# Altium PCB captivate_phone.PcbDoc
Units mil, origin at the board's own origin, x right, y up, seen from the top; angles counter-clockwise.
Board outline 6900 x 5300 mil, 2 copper layers (Top Layer, Bottom Layer), stack 62 mil thick; 22 components, 22 nets, 83 pads, 102 vias.
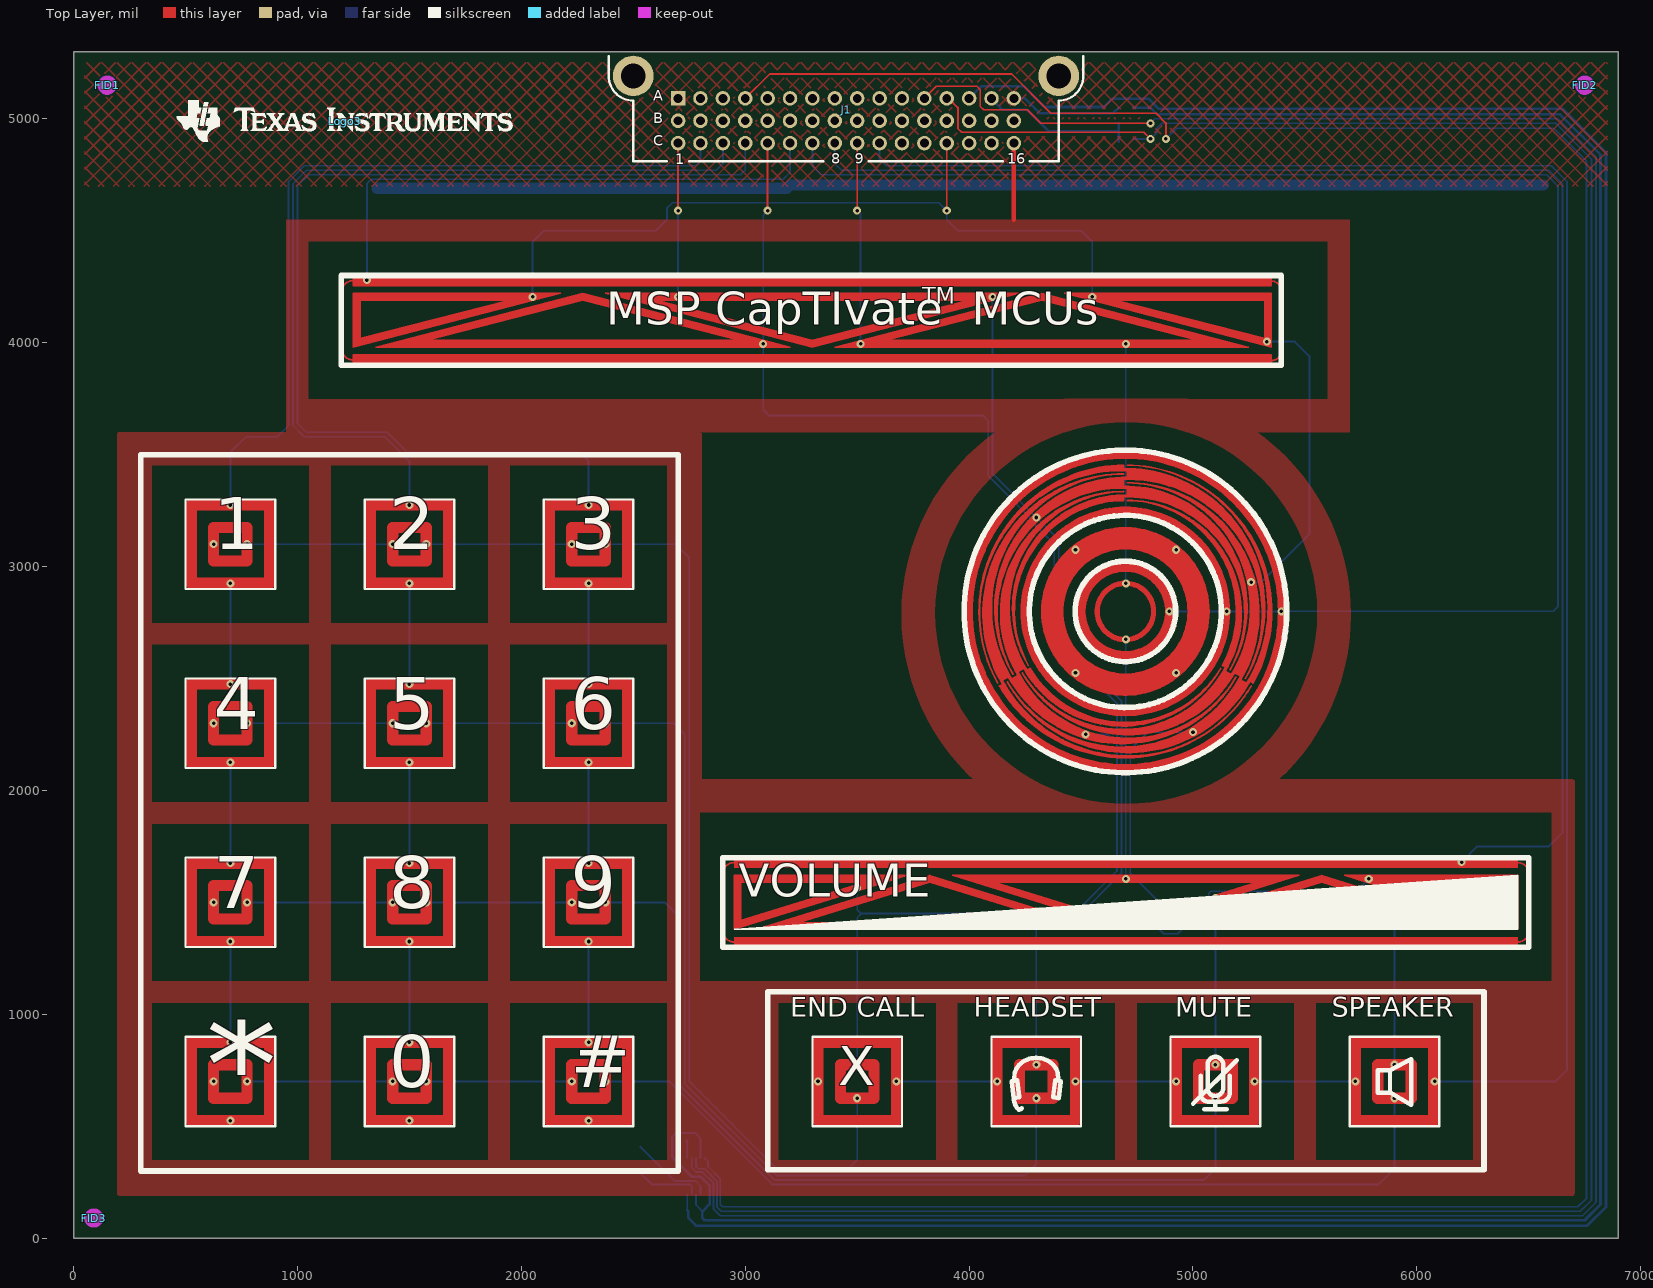
[diagram p0: Top Layer view]
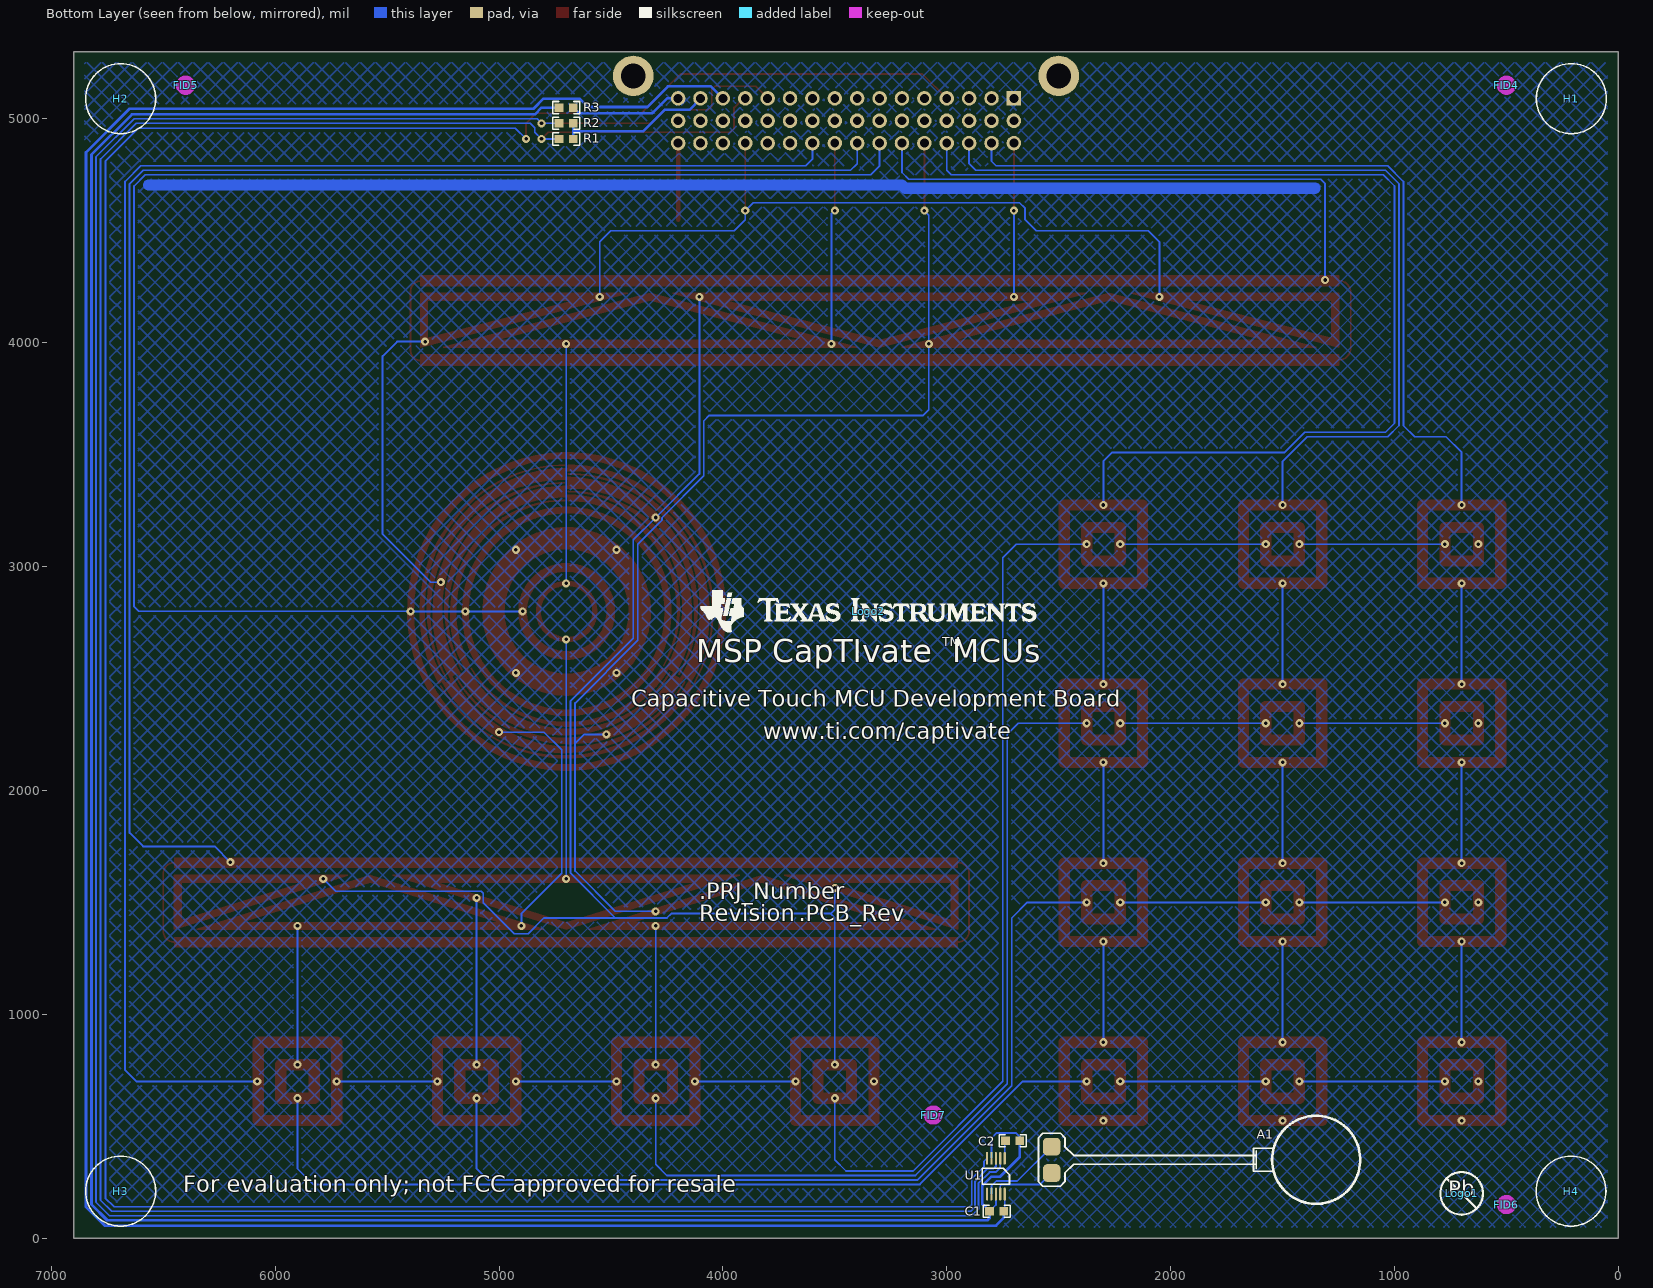
[diagram p1: Bottom Layer view, seen from below]

## Layer stack, top to bottom
Top Solder: solder mask 0.4, Solder Resist, Dk 3.5
Top Layer: signal copper 1.4
Dielectric1: core 59.2, FR-4, Dk 4.8
Bottom Layer: signal copper 1.4
Bottom Solder: solder mask 0.4, Solder Resist, Dk 3.5

## Board outline
0,0 0,5300 6900,5300 6900,0

## Design rules (kind name [scope] priority, off if disabled: settings)
AcuteAngle [All] p1: minimum=4.50000000000000E+0001 checktracksonly=TRUE
AssemblyTestPointUsage [All] p1: valid=2
Clearance Clearance_BoardEdge_MountingHoles [OnCopper and InComponentClass('Mounting Holes') vs IsKeepOut] p1: gap=40
Clearance Clearance_BoardEdge_Poly [OnCopper and InPoly vs IsKeepOut] p2: gap=8
Clearance Clearance_BoardEdge [OnCopper and Not InComponentClass('Logo') and not InComponentClass('FiducialMark') and not InRegion(1000,500,4000,800) and Not IsKeepout vs IsKeepOut] p3: gap=8
Clearance Clearance_Poly [InPolygon] p4: gap=12
Clearance [All] p5: gap=6
ComponentClearance ComponentClearance_Logo [InComponentClass(Logo)] p1: gap=50 collisioncheckmode=3 verticalgap=10 showdistances=FALSE
ComponentClearance ComponentClearance_ScrewToNut [(HasFootprint('NY PMS 440 0025 PH')) vs (HasFootprint('Keystone_1902C'))] p2: gap=5 collisioncheckmode=3 verticalgap=10 showdistances=FALSE
ComponentClearance ComponentClearance_MountingHoles [InComponentClass('Mounting Holes')] p3: gap=250 collisioncheckmode=3 verticalgap=100000 showdistances=FALSE
ComponentClearance ComponentClearance_SmallPassives [HasFootprint('0201*') or HasFootprint('0402*') or HasFootprint('0508') or HasFootprint('0603*') or HasFootprint('0612') or HasFootprint('0805*') or HasFootprint('0815*') or HasFootprint('0830*') or HasFootprint('1206*') or HasFootprint('1210*') or HasFootprint('1808*') or HasFootprint('1812*') or HasFootprint('1825*') or HasFootprint('2010*') or HasFootprint('2220*') or HasFootprint('2225*') or HasFootprint('2512*') or HasFootprint('2728*') or HasFootprint('3518*') vs HasFootprint('0201*') or HasFootprint('0402*') or HasFootprint('0508') or HasFootprint('0603*') or HasFootprint('0612') or HasFootprint('0805*') or HasFootprint('0815*') or HasFootprint('0830*') or HasFootprint('1206*') or HasFootprint('1210*') or HasFootprint('1808*') or HasFootprint('1812*') or HasFootprint('1825*') or HasFootprint('2010*') or HasFootprint('2220*') or HasFootprint('2225*') or HasFootprint('2512*') or HasFootprint('2728*') or HasFootprint('3518*')] p4: gap=20 collisioncheckmode=3 verticalgap=10 showdistances=FALSE
ComponentClearance ComponentClearance_THtoSMT [IsThruComponent vs IsSMTComponent] p5: gap=100 collisioncheckmode=3 verticalgap=100000 showdistances=FALSE
ComponentClearance ComponentClearance_THtoTH [IsThruComponent vs IsThruComponent] p6: gap=118.11 collisioncheckmode=3 verticalgap=100000 showdistances=FALSE
ComponentClearance [All] p7: gap=40 collisioncheckmode=3 verticalgap=10 showdistances=FALSE
DiffPairsRouting [All] p1: maxlimit=100 minlimit=10 mostfreqgap=10 toplayer_minwidth=15 toplayer_maxwidth=15 toplayer_prefwidth=15 bottomlayer_minwidth=15 bottomlayer_maxwidth=15 bottomlayer_prefwidth=15 maxuncoupledlength=1000
FabricationTestPointUsage TestPointUsage [All] p1: valid=2 allowmultiple=FALSE
FabricationTestpoint Testpoint [All] p1: side=3 testpointundercomponent=TRUE minsize=40 maxsize=100 preferedsize=60 minholesize=0 maxholesize=40 preferedholesize=32 testpointgrid=1 allowsidetop=TRUE allowsidebottom=TRUE usegrid=TRUE gridtolerance=0.01
FanoutControl Fanout_LCC [IsLCC] p1: bgadir=Out bgaviamode=Centered fanoutstyle=Auto fanoutdirection=Alternating viagrid=1 // Fanout_LCC (Default Rule)
FanoutControl Fanout_BGA [IsBGA] p2: bgadir=Out bgaviamode=Centered fanoutstyle=Auto fanoutdirection=Alternating viagrid=1 // Fanout_BGA (Default Rule)
FanoutControl Fanout_Default [All] p4: bgadir=Out bgaviamode=Centered fanoutstyle=Auto fanoutdirection=Alternating viagrid=1 // Fanout_Default (Default Rule)
FanoutControl Fanout_Small [(CompPinCount < 5)] p5: bgadir=Out bgaviamode=Centered fanoutstyle=Auto fanoutdirection=OutThenIn viagrid=1 // Fanout_Small (Default Rule)
HoleSize [All] p1: absolutevalues=TRUE maxlimit=251 minlimit=8 maxpercent=80.000 minpercent=20.000
MinimumAnnularRing [All] p1: minimumring=9
MinimumSolderMaskSliver MinimumSolderMaskSliver_Logo [InComponentClass('Logo') vs InComponentClass('Logo')] p1: minsoldermaskwidth=0.7
MinimumSolderMaskSliver [All] p2: minsoldermaskwidth=4
NetAntennae [All] p1 off: netantennaetolerance=0
PlaneConnect [All] p1: planeconnectstyle=Direct reliefexpansion=10 reliefentries=4 reliefconductorwidth=20 reliefairgap=10
PolygonConnect [All] p1: connectstyle=Direct reliefconductorwidth=12 reliefentries=4 polygonreliefangle="45 Angle" airgapwidth=10
RoutingVias [All] p1: holewidth=16 width=34 viastyle="Through Hole" minholewidth=8 minwidth=26 maxholewidth=40 maxwidth=65
SMDToCorner [All] p1: distance=30000
SilkToSilkClearance [All] p1: silktosilkclearance=5
SilkToSolderMaskClearance SilkscreenOverComponentPads [IsPad] p1: minsilkscreentomaskgap=5 clearancetoexposedcopper=TRUE
SolderMaskExpansion [All] p1: expansion=3
UnpouredPolygon [All] p1: allowunpoured=FALSE
Width [All] p1: maxlimit=100 minlimit=6 preferedwidth=10 checkconnectedcopper=TRUE
14 further rules are at their usual default settings.

## Classes and differential pairs
component class Logo: Logo2 Logo3
component class FiducialMark: FID1 FID2 FID3 FID4 FID5 FID6 FID7

## Components (designator, comment, footprint, x,y, rotation, side; value= is the part's Value field where it differs from the comment)
A1 "DMJBRN1030XX" SEMCO1030 1350,350 r0 bottom
C1 "C0603C105K8PACTU" 0603 2776.97,120 r0 bottom
C2 "C0603C105K8PACTU" 0603 2705.48,435 r180 bottom
FID1 "Fiducial" Fiducial10-20 150,5150 r0 top
FID2 "Fiducial" Fiducial10-20 6750,5150 r0 top
FID3 "Fiducial" Fiducial10-20 90,90 r0 top
FID4 "Fiducial" Fiducial10-20 500,5150 r180 bottom
FID5 "Fiducial" Fiducial10-20 6400,5150 r180 bottom
FID6 "Fiducial" Fiducial10-20 500,150 r180 bottom
FID7 "Fiducial" Fiducial10-20 3060,550 r180 bottom
H1 "SJ61A1" Bumpon_SJ61A1 210,5090 r90 bottom
H2 "SJ61A1" Bumpon_SJ61A1 6690,5090 r90 bottom
H3 "SJ61A1" Bumpon_SJ61A1 6690,210 r90 bottom
H4 "SJ61A1" Bumpon_SJ61A1 211.41,210 r90 bottom
J1 "CAPTIVATE-CONN-FR2633-PANEL" CAPTIVATE-CONN-48 3450,5300 r0 top
Logo1 "Pb-Free Symbol" Pb-Free_Overlay_Medium 700,200 r180 bottom
Logo2 "Texas Instruments" TI_Horizontal_Overlay_Medium 3350,2800 r180 bottom
Logo3 "Texas Instruments" TI_Horizontal_Overlay_Medium 1210,4990 r0 top
R1 "CRCW06035K23FKEA" 0603 4700,4910 r180 bottom
R2 "CRCW06035K23FKEA" 0603 4700,4980 r180 bottom
R3 "CRCW06030000Z0EA" 0603 4700,5050 r180 bottom
U1 "DRV2605LDGS" DGS0010A_L 2780.48,276.76 r270 bottom

## Footprints (in the part's own frame and the unit in brackets; to place one, negate y for a bottom-side part, rotate by r counter-clockwise, add the part's x,y. Pads: shape width x height; smd on the part's side, far side on the other; paste and mask are expansions set on the pad)
0603 [mm] "0603 from SM-752 data"
  rect 1x0.95 smd: 1(-0.8,0) 2(0.8,0)
  silkscreen extent -1.52,-0.69 1.52,0.69, body extent -0.87,-0.47 0.87,0.47, height 0.85
Bumpon_SJ61A1 [mil] "3M Cylindrical Bumpon black"
  round 1 on Mech4: 0(0,0)
  silkscreen extent -156,-156 156,156, body extent -156,-155 156,156, height 201
CAPTIVATE-CONN-48 [mm] "Connector, 3x16, 100mil, TH, RA"
  rect 1.65x1.65 hole 1: A1(-19.05,-5.3)
  round 1.65 hole 1: A2(-16.51,-5.3) A3(-13.97,-5.3) A4(-11.43,-5.3) A5(-8.89,-5.3) A6(-6.35,-5.3) A7(-3.81,-5.3) A8(-1.27,-5.3) A9(1.27,-5.3) A10(3.81,-5.3) A11(6.35,-5.3) A12(8.89,-5.3) A13(11.43,-5.3) A14(13.97,-5.3) A15(16.51,-5.3) A16(19.05,-5.3) B1(-19.05,-7.84) B2(-16.51,-7.84) B3(-13.97,-7.84) B4(-11.43,-7.84) B5(-8.89,-7.84) B6(-6.35,-7.84) B7(-3.81,-7.84) B8(-1.27,-7.84) B9(1.27,-7.84) B10(3.81,-7.84) B11(6.35,-7.84) B12(8.89,-7.84) B13(11.43,-7.84) B14(13.97,-7.84) B15(16.51,-7.84) B16(19.05,-7.84) C1(-19.05,-10.38) C2(-16.51,-10.38) C3(-13.97,-10.38) C4(-11.43,-10.38) C5(-8.89,-10.38) C6(-6.35,-10.38) C7(-3.81,-10.38) C8(-1.27,-10.38) C9(1.27,-10.38) C10(3.81,-10.38) C11(6.35,-10.38) C12(8.89,-10.38) C13(11.43,-10.38) C14(13.97,-10.38) C15(16.51,-10.38) C16(19.05,-10.38)
  round 4.6 hole 2.8: H1(-24.13,-2.76) H2(24.13,-2.76)
  silkscreen extent -26.92,-12.45 26.92,-0.51
DGS0010A_L [mm] "TSSOP, 10-Leads, Body 3x3mm, Pitch 0.5mm, IPC High Density"
  oval 1.45x0.25 smd: 1(-2.025,1) 2(-2.025,0.5) 3(-2.025,0) 4(-2.025,-0.5) 5(-2.025,-1) 6(2.025,-1) 7(2.025,-0.5) 8(2.025,0) 9(2.025,0.5) 10(2.025,1)
  silkscreen extent -0.9,-1.55 0.9,1.55, body extent -2.45,-1.5 2.45,1.5, height 0.94
Fiducial10-20 [mm]
  round 1 smd mask+0.5: 1(0,0)
  Top Layer keep-out circle w1.178: c0,0 r0.5
Pb-Free_Overlay_Medium [mil]
  silkscreen extent -95,-95 95,95
SEMCO1030 [mm] "Footprint for SEMCO 10mm x 3mm LRA"
  rrect50% 2x2 smd: 1(30,1.5) 2(30,-1.5)
  silkscreen extent -5,-5 31.5,5
TI_Horizontal_Overlay_Medium [mil]
  silkscreen extent -750,-93 750,94

## Part data
A1: "Linear Resonant Actuator"
C1 C2: "CAP, CERM, 1 µF, 10 V, +/- 10%, X5R, 0603"
FID1 FID2 FID3 FID4 FID5 FID6 FID7: "Fiducial mark.  There is nothing to buy or mount."
H1 H2 H3 H4: "Bumpon, Cylindrical, 0.312 X 0.200, Black"
J1: library part CAPTIVATE-CONN-MSP-EXP430FR2633-PANEL, "CapTIvate Panel-Side Connector, 3x16, 100mil, TH, RA, M, MSP-EXP430FR2633"
Logo1: library part Pb-Free
Logo2 Logo3: library part TI_Logo, "Texas Instrument Corporate Signature"
R1 R2: "RES, 5.23 k, 1%, 0.1 W, 0603"
R3: "RES, 0, 5%, 0.1 W, 0603"
U1: "Haptic Driver for LRA and ERM With Built-In Library and Smart Loop Architecture, DGS0010A"

## Via types
v1: diameter 36, hole 16, Top Layer to Bottom Layer, tented both sides, 102 vias

## Nets (pads, with @x,y where several pads share a name; then routed paths per layer and width w, separated by ;. In a path a pad name is that pad's centre, name@x,y a point inside that pad or via, vN(x,y) a via of type N, cw(c..) or ccw(c..) an arc to the next point about the centre after c; other vN are vias at no path point)
CAP0.0: J1.C1 | length 39694.2
  Top Layer w6: 2375,4220 3300,3980 4108.92,4189.88 4225,4220 2375,4220 ; 2605,4190 3995,4190 3300,4010 2605,4190 ; 2950,1380 2950,1620 3725,1620 3504.15,1551.61 2950,1380 ; 2980,1420 2980,1590 3535,1590 3496,1578.05 2980,1420 ; 5675,1620 5779.61,1587.6 6450,1380 6450,1620 5675,1620 ; 5865,1590 6420,1420 6420,1590 5865,1590
  Top Layer w7.87: 4128.03,2479.58 cw(c4684.26,2791.63) 4705.78,3429.04 4705.78,3397.88 ccw(c4697.91,2815.27) 4196.22,2518.95 cw(c4684.25,2791.63) 4705.78,3350.25 4705.78,3319.13 ccw(c4697.91,2815.28) 4264.42,2558.33 cw(c4697.91,2799.51) 4690.03,3295.51 4690.03,3310.85 cw(c4711.57,2791.62) 5165.5,2538.64 ccw(c4697.91,2815.28) 4690.03,3358.51 4690.03,3389.65 cw(c4711.56,2791.63) 5233.69,2499.27 ccw(c4697.91,2815.27) 4690.03,3437.26 4690.03,3453.01 ccw(c4697.91,2799.51) 4128.03,2479.58
  Top Layer w8: v1(2700,4590) J1.C1
  Top Layer w50: 625,3025 775,3025 775,3175 625,3175 v1(625,3100) 625,3025 ; 1425,3025 1575,3025 1575,3175 1425,3175 1425,3025 ; 2225,3025 2375,3025 v1(2375,3100) 2375,3175 2225,3175 2225,3025 ; 3425,625 3425,775 v1(3500,775) 3575,775 3575,625 3425,625
  Bottom Layer w8: v1(775,3100) v1(1425,3100) ; v1(1575,3100) v1(2225,3100) ; v1(2375,3100) 2690,3100 2750,3040 2750,700 3150,300 3450,300 3500,350 v1(3500,625) ; v1(2700,4205) v1(2700,4590) ; v1(3500,775) 3500,1432.5 3517.5,1450 ; v1(3500,1565) 3500,1467.5 3517.5,1450 ; v1(4105,4205) 4105,3414 v1(4300,3219) 4400,3119 4400,2680 4680,2400 4680,1630 4480,1430 ; v1(5785,1605) 5730,1550 5080,1550 5070,1540 5070,1498.13 4931.87,1360 4870,1360 4800,1430 4480,1430 ; 3517.5,1450 4230,1450 4250,1430 4480,1430
CAP0.1: J1.C2 | length 10543.3
  Top Layer w50: 525,525 525,875 875,875 875,525 525,525 ; 525,1325 525,1675 875,1675 875,1325 525,1325 ; 525,2125 525,2475 875,2475 875,2125 525,2125 ; 525,2925 525,3275 v1(700,3275) 875,3275 875,2925 525,2925
  Bottom Layer w8: v1(700,875) v1(700,1325) ; v1(700,1675) v1(700,2125) ; v1(700,2475) v1(700,2925) ; v1(700,3275) 700,3510 770,3580 910,3580 960,3630 960,4720 1030,4790 2780,4790 2800,4810 J1.C2
  other v1: 700,525
CAP0.2: J1.C3 | length 10859.9
  Top Layer w50: 1325,525 1325,875 1675,875 1675,525 1325,525 ; 1325,1325 1325,1675 1675,1675 1675,1325 1325,1325 ; 1325,2125 1675,2125 1675,2475 1325,2475 1325,2125 ; 1325,2925 1675,2925 1675,3275 v1(1500,3275) 1325,3275 1325,2925
  Bottom Layer w8: v1(1500,875) v1(1500,1325) ; v1(1500,1675) v1(1500,2125) ; v1(1500,2475) v1(1500,2925) ; v1(1500,3275) 1500,3470 1390,3580 1030,3580 980,3630 980,4710 1040,4770 2870,4770 2900,4800 J1.C3
  other v1: 1500,525
CAP0.3: J1.C4 | length 11725.7
  Top Layer w50: 2125,525 2125,875 2475,875 2475,525 2125,525 ; 2125,1325 2475,1325 2475,1675 2125,1675 2125,1325 ; 2125,2125 2475,2125 2475,2475 2125,2475 2125,2125 ; 2125,2925 2125,3275 v1(2300,3275) 2475,3275 2475,2925 2125,2925
  Bottom Layer w8: v1(2300,875) v1(2300,1325) ; v1(2300,1675) v1(2300,2125) ; v1(2300,2475) v1(2300,2925) ; v1(2300,3275) 2300,3470 2260,3510 1490,3510 1400,3600 1040,3600 1000,3640 1000,4700 1050,4750 2980,4750 3000,4770 J1.C4
  other v1: 2300,525
CAP1.0: J1.C5 | length 37723.2
  Top Layer w6: 1350,3980 2275,4220 3083.92,4010.12 3200,3980 1350,3980 ; 1580,4010 2970,4010 2275,4190 1580,4010 ; 3050,1380 4600,1380 4504.51,1409.57 4303.65,1471.77 3829.24,1618.69 3825,1620 3820.76,1618.69 3050,1380 ; 3240,1410 3825,1590 4295.46,1445.24 4410,1410 3240,1410
  Top Layer w7.87: 4135.9,2465.94 ccw(c4697.91,2799.51) 5259.87,2465.86 cw(c4711.56,2791.63) 4148.78,2491.56 4175.77,2507.14 ccw(c4684.26,2791.63) 5191.72,2505.32 cw(c4711.56,2791.63) 4217.02,2530.96 4243.96,2546.52 ccw(c4684.25,2791.62) 5123.52,2544.69 cw(c4697.91,2799.51) 4272.3,2544.69 4259.02,2537.02 cw(c4697.91,2815.28) 4690.03,3334.88 ccw(c4684.25,2791.63) 4217.74,2513.19 4190.77,2497.62 cw(c4697.91,2815.27) 4690.03,3413.63 ccw(c4684.26,2791.63) 4149.54,2473.82 4135.9,2465.94
  Top Layer w8: v1(3100,4590) J1.C5 J1.C5@3100,4910
  Top Layer w50: 625,2225 v1(625,2300) 625,2375 775,2375 775,2225 625,2225 ; 1425,2225 1425,2375 1575,2375 1575,2225 1425,2225 ; 2225,2225 2225,2375 2375,2375 v1(2375,2300) 2375,2225 2225,2225 ; 4225,625 4225,775 v1(4300,775) 4375,775 4375,625 v1(4300,625) 4225,625
  Bottom Layer w8: v1(775,2300) v1(1425,2300) ; v1(1575,2300) v1(2225,2300) ; v1(2375,2300) 2680,2300 2730,2250 2730,690 3140,280 4250,280 4300,330 v1(4300,625) ; v1(3100,4590) 3080,4570 v1(3080,3995) 3080,3700 3105,3675 4060,3675 4085,3650 4085,3405 4272,3218 4272,3207.4 4288.4,3191 4289,3191 4380,3100 4380,2670 4660,2390 4660,2210 ; v1(4300,775) v1(4300,1395) ; v1(4300,1460) 4480,1460 4660,1640 4660,2210 ; v1(4520,2250) 4620,2250 4660,2210
CAP1.1: J1.C6 | length 19876.2
  Top Layer w6: 1250,3900 5350,3900 5350,3945 1250,3945 1250,3922.5 1250,3900 ; 1250,4255 1250,4277.5 1250,4300 5350,4300 5350,4255 1250,4255
  Top Layer w8: 1250,3922.5 cw(c1250,3977.5) 1195,3977.5 1195,4222.5 cw(c1250,4222.5) 1250,4277.5 ; 5350,3920 ccw(c5350,3965) 5395,3965 5395,4230 ccw(c5350,4230) 5350,4275
  Bottom Layer w8: v1(1310,4280) 1310,4710 1330,4730 3170,4730 3200,4760 J1.C6
CAP1.2: J1.C7 | length 22822.1
  Top Layer w7.87: 4697.91,2090.85 ccw(c4697.91,2799.51) 5203.5,3296.08 ccw(c4697.91,2799.51) 4697.91,3508.17 ; 4697.91,2090.85 cw(c4697.91,2799.51) 4697.91,3508.17 ; 4697.91,2090.85 4697.91,2114.47 ; 4697.91,2114.47 ccw(c4697.91,2799.51) 4697.91,3484.55 ; 4697.91,2114.47 cw(c4697.91,2799.51) 4697.91,3484.55 ; 4697.91,3484.55 4697.91,3508.17 ; v1@5138.85,2799.51 ccw(c4697.91,2799.51) v1@5138.85,2799.51 ; v1@5162.48,2799.51 ccw(c4697.91,2799.51) v1@5162.48,2799.51
  Top Layer w39.37: v1(4894.76,2799.51) ccw(c4697.91,2799.51) v1(4894.76,2799.51)
  Bottom Layer w8: J1.C7 3300,4790 3340,4750 6580,4750 6630,4700 6630,2820 6610,2800 v1(5395,2800) ; v1(4894.76,2799.51) v1@5394.51,2799.51
  other v1: 5150,2800
CAP1.3: J1.C8 | length 7606.6
  Top Layer w8: 2950,1322.5 cw(c2950,1372.5) 2900,1372.5 2900,1627.5 cw(c2950,1627.5) 2950,1677.5 ; 6450,1322.5 ccw(c6450,1372.5) 6500,1372.5 6500,1627.5 ccw(c6450,1627.5) 6450,1677.5
  Bottom Layer w8: J1.C8 3400,4800 3430,4770 6590,4770 6650,4710 6650,1810 6590,1750 6270,1750 v1(6200,1680)
CAP2.0: J1.C9 | length 24465.3
  Top Layer w6: 3400,3980 5250,3980 4325,4220 3511.39,4008.9 3400,3980 ; 3630,4010 5020,4010 4325,4190 3630,4010 ; 3925,1620 5475,1620 5104.56,1505.28 4700,1380 3925,1620 ; 4115,1590 5285,1590 5096.32,1531.95 4700,1410 4115,1590
  Top Layer w8: v1(3500,4590) J1.C9 J1.C9@3500,4910
  Top Layer w23.62: 4823.9,2799.45 ccw(c4697.91,2799.45) 4823.9,2799.45
  Top Layer w50: 625,1425 v1(625,1500) 625,1575 775,1575 775,1425 625,1425 ; 1425,1425 v1(1425,1500) 1425,1575 1575,1575 1575,1425 1425,1425 ; 2225,1425 v1(2225,1500) 2225,1575 2375,1575 v1(2375,1500) 2375,1425 2225,1425 ; 5025,625 5025,775 v1(5100,775) 5175,775 5175,625 5025,625
  Bottom Layer w8: v1(775,1500) v1(1425,1500) ; v1(1575,1500) v1(2225,1500) ; v1(2375,1500) 2640,1500 2710,1430 2710,680 3130,260 5050,260 5100,310 v1(5100,625) ; v1(3500,4590) 3515,4575 v1(3515,3995) ; v1(4700,1605) v1(4700,2675) ; v1(4700,2925) v1(4700,3995) ; v1(5100,775) v1(5100,1520)
CAP2.1: J1.C10 | length 14713.5
  Top Layer w50: 3325,525 3675,525 3675,875 3325,875 3325,525 ; 4125,525 v1(4125,700) 4125,875 4475,875 4475,525 4125,525 ; 4925,525 v1(4925,700) 4925,875 5275,875 5275,525 4925,525 ; 5725,525 v1(5725,700) 5725,875 6075,875 6075,525 5725,525
  Bottom Layer w8: J1.C10 3600,4820 3630,4790 6600,4790 6670,4720 6670,750 6620,700 v1(6080,700) ; v1(3675,700) v1(4125,700) ; v1(4475,700) v1(4925,700) ; v1(5275,700) v1(5725,700)
  other v1: 3325,700
CAP3.0: J1.C13 | length 39428
  Top Layer w6: 1945,4190 1280,4020 1280,4190 1945,4190.14 ; 1250,3980 1250,4220 2175,4220 2054.24,4188.67 1250,3980 ; 4425,4220 5350,4220 5350,3980 5325.18,3986.44 4545.76,4188.67 4425,4220 ; 4655,4190 5320,4190 5320,4020 4655,4190 ; 4800,1380 4895.49,1409.57 5570.76,1618.69 5575,1620 5579.24,1618.69 6350,1380 4800,1380 ; 4990,1410 5575,1590 6160,1410 4990,1410
  Top Layer w7.87: 4170,2485.63 ccw(c4684.26,2791.63) 5212.92,2511.26 5185.95,2526.83 cw(c4711.56,2791.63) 4238.2,2525 ccw(c4684.25,2791.62) 5144.68,2550.66 5131.4,2558.33 ccw(c4697.91,2799.51) 4705.79,3295.51 cw(c4711.57,2791.62) 5143.98,2532.88 5170.93,2517.32 ccw(c4697.91,2815.28) 4705.78,3374.26 cw(c4711.56,2791.63) 5212.18,2493.5 5239.16,2477.92 ccw(c4697.91,2815.27) 4705.87,3453 cw(c4697.91,2799.51) 5267.79,2479.58 5254.15,2487.45 cw(c4711.56,2791.63) 4170,2485.63
  Top Layer w8: v1(3900,4590) J1.C13
  Top Layer w50: 625,625 v1(625,700) 625,775 775,775 775,625 625,625 ; 1425,625 1575,625 1575,775 1425,775 v1(1425,700) 1425,625 ; 2225,625 v1(2225,700) 2225,775 2375,775 v1(2375,700) 2375,625 2225,625 ; 5825,625 5825,775 v1(5900,775) 5975,775 5975,625 5825,625
  Bottom Layer w8: v1(775,700) v1(1425,700) ; v1(1575,700) v1(2225,700) ; v1(2050,4205) 2050,4450 2100,4500 2600,4500 2650,4550 2650,4600 2675,4625 3865,4625 v1(3900,4590) 3900,4550 3950,4500 4500,4500 4550,4450 v1(4550,4205) ; v1(2375,700) 2660,700 3120,240 5830,240 5900,310 v1(5900,625) ; v1(4900,1395) 4900,1450 4720,1630 4720,2180.94 4799.06,2260 v1(5000,2260) ; v1(5260,2930) 5305,2930 5520,3145 5520,3940 5455,4005 v1(5330,4005) ; v1(5900,775) v1(5900,1395)
CAP3.3: J1.C16 | length 341.3
  Top Layer w20: 4200,4550 J1.C16
DRV_GND: C1.2 C2.2 R3.1 U1.4 U1.8 | length 11698.4
  Bottom Layer w8: C2.2@2673.98,452.98 2691,470 2776,470 2800.16,445.84 U1.4@2800.16,357.47 ; U1.8@2780.48,196.06 2780.48,147.99 C1.2
  Bottom Layer w12: C2.2@2673.98,452.98 C2.2 2673.98,362.02 2761,275 2801,275 2841,235 2841,152.53 C1.2 2808.47,90.07 2818.54,80 6750,80 6820,150 6820,4840 6640,5020 4840,5020 4810,5050 R3.1
DRV_OUT+: A1.2 U1.7 | length 378.9
  Bottom Layer w8: A1.2 2685,255.16 2778.01,255.16 2800.16,233.01 U1.7@2800.16,196.06
DRV_OUT-: A1.1 U1.9 | length 290.6
  Bottom Layer w8: A1.1 2582.05,240 2753.8,240 2760.79,233.01 U1.9@2760.79,196.06
DRV_VREG: C2.1 U1.1 | length 78.4
  Bottom Layer w8: U1.1@2741.11,357.47 C2.1@2741.11,432.87
  Bottom Layer w12: C2.1@2738.98,435 C2.1@2741.11,432.87
GND: J1.A1 J1.A16 R3.2 | length 7797.3
  Top Layer w12: J1.A1 J1.A1@2721.34,5091.34
  Top Layer w100: 5024.83,2799.45 ccw(c4698.06,2799.45) 5024.83,2799.45
  Bottom Layer w12: J1.A16 4248.66,5091.34 4315,5025 4643.5,5025 R3.2
  Bottom Layer w50: 1355,4690 3185,4690 3200,4705 6565.24,4705
  other v1: 4475,2525 4925,2525 4475,3075 4925,3075
P1.0: J1.A4 U1.5 | length 12801.7
  Top Layer w8: J1.A4 3110,5200 4190,5200 4365,5025 4835,5025 4879.16,4980.84 v1(4879.16,4910)
  Bottom Layer w8: U1.5@2819.85,357.47 2833.54,343.78 2833.54,320 2888.54,265 2888.54,150 2898.54,140 3040,140 6720.89,142 6758,179.11 6758,4810.89 6610.89,4958 4927.16,4958 v1(4879.16,4910)
SCL: J1.A12 R2.1 U1.2 | length 12236.2
  Top Layer w8: J1.A12@3800,5080 J1.A12 3853.66,5145 4035,5145 4050,5130 4050,5055 4065,5040 4260,5040 4320,4980 v1(4810,4980)
  Bottom Layer w8: U1.2@2760.79,357.47 2760.79,314.69 2780.48,295 2808.54,295 2858.54,245 2858.54,130 2888.54,100 6740,100 6800,160 6800,4830 6630,5000 4830,5000 v1(4810,4980) R2.1
SDA: J1.A13 R1.1 U1.3 | length 12052.9
  Top Layer w8: J1.A13 3908.66,5091.34 3950,5050 3950,4956.69 3966.69,4940 4780,4940 v1(4810,4910)
  Bottom Layer w8: U1.3@2780.48,357.47 2780.48,320.52 2791,310 2818.54,310 2873.54,255 2873.54,140 2893.54,120 6730,120 6780,170 6780,4820 6620,4980 4860,4980 4840,4960 4840,4940 v1(4810,4910) R1.1
VCC_3P3V: J1.A15 R1.2 R2.2 | length 711.4
  Bottom Layer w12: J1.A15@4100,5090 4150,5040 4260,5040 4355,4945 4668.5,4945 ; R1.2@4668.5,4898.5 R1.2 4668.5,4945 ; R2.2 4668.5,4945
  Bottom Layer w20: J1.A15@4100,5090 J1.A15
VCC_5V: C1.1 J1.A14 U1.10 | length 11986
  Bottom Layer w8: C1.1@2741.11,124.37 U1.10@2741.11,196.06
  Bottom Layer w12: C1.1@2741.11,124.37 C1.1 2745.48,90.52 2780,56 6761,56 6845,140 6845,4850 6650,5045 4846.11,5045 4801.11,5090 4640,5090 4603,5053 4337,5053 4245,5145 4053.66,5145 J1.A14
pads on no net: FID1.1 FID2.1 FID3.1 FID4.1 FID5.1 FID6.1 FID7.1 H1.0 H2.0 H3.0 H4.0 J1.A2 J1.A3 J1.A5 J1.A6 J1.A7 J1.A8 J1.A9 J1.A10 J1.A11 J1.B1 J1.B2 J1.B3 J1.B4 J1.B5 J1.B6 J1.B7 J1.B8 J1.B9 J1.B10 J1.B11 J1.B12 J1.B13 J1.B14 J1.B15 J1.B16 J1.C11 J1.C12 J1.C14 J1.C15 J1.H1 J1.H2 U1.6

## Polygon pours and split planes (outlines as drawn)
GND on Top Layer "Top Layer-No Net 3" (hatched 45Degree grid 48 track 8, remove dead copper, pour order 10): 50,5250 50,4700 6850,4700 6850,5250 50,5250
CAP3.3 on Top Layer "Top Layer-No Net 1" (solid, pour order 12): 950,3600 5700,3600 5700,4550 950,4550
CAP3.3 on Top Layer "Top Layer-No Net" (solid, pour order 11): 194.99,195 194.99,3595 cw(c200,3595) 200,3600.02 2800,3600.02 cw(c2800,3595) 2805.01,3595 2805.01,2050.01 4019.02,2050.01 cw(c4701.5,2785) 5704.49,2785 cw(c4701.5,2785) 5383.98,2050.01 6700,2050.01 cw(c6700,2045) 6705.02,2045 6705.02,195 cw(c6700,195) 6700,189.98 200,189.98 cw(c200,195)
GND on Bottom Layer "Bottom Layer-No Net" (hatched 45Degree grid 48 track 8, remove dead copper, pour order 8): 50,50 6850,50 6850,5250 50,5250

## Other copper
Top Layer:
  region net CAP1.3: 2950,1300 2950,1345 6450,1345 6450,1300
  region net CAP1.3: 2950,1700 2950,1655 6450,1655 6450,1700
  region net CAP0.0: 5675,1620 6450,1620 6450,1380 5675,1620 5865,1590 6420,1590 6420,1420 5865,1590
  region net CAP3.0: 4800,1380 6350,1380 5575,1620 4800,1380 4990,1410 6160,1410 5575,1590 4990,1410
  region net CAP2.0: 3925,1620 4700,1380 5475,1620 3925,1620 4115,1590 4700,1410 5285,1590 4115,1590
  region net CAP1.0: 3050,1380 3825,1620 4595,1380 3050,1380 3240,1410 3825,1590 4410,1410 3240,1410
  region net CAP0.0: 2950,1620 3725,1620 2950,1380 2950,1620 2980,1590 3535,1590 2980,1420 2980,1590
  pour cut-out: 1050,3750 1050,4450 5600,4450 5600,3750
  pour cut-out: 2800,1150 6600,1150 6600,1900 2800,1900
  pour cut-out: 5550,350 5550,1050 6250,1050 6250,350
  pour cut-out: 4750,350 4750,1050 5450,1050 5450,350
  pour cut-out: 3950,350 3950,1050 4650,1050 4650,350
  pour cut-out: 3150,350 3150,1050 3850,1050 3850,350
  pour cut-out: 1950,350 1950,1050 2650,1050 2650,350
  pour cut-out: 1150,350 1150,1050 1850,1050 1850,350
  pour cut-out: 350,350 350,1050 1050,1050 1050,350
  pour cut-out: 1950,1150 1950,1850 2650,1850 2650,1150
  pour cut-out: 1150,1150 1150,1850 1850,1850 1850,1150
  pour cut-out: 350,1150 350,1850 1050,1850 1050,1150
  pour cut-out: 1950,1950 1950,2650 2650,2650 2650,1950
  pour cut-out: 1150,1950 1150,2650 1850,2650 1850,1950
  pour cut-out: 350,1950 350,2650 1050,2650 1050,1950
  pour cut-out: 1950,2750 1950,3450 2650,3450 2650,2750
  pour cut-out: 1150,2750 1150,3450 1850,3450 1850,2750
  pour cut-out: 350,2750 350,3450 1050,3450 1050,2750
  region net CAP3.0: 1250,4220 2175,4220 1250,3980 1250,4220 1280,4190 1945,4190.14 1280,4020 1280,4190
  region net CAP1.0: 1351,3980.26 2275,4220 3200,3980 1351,3980.26 1580,4010 2275,4190 2970,4010 1581,4010.26
  region net CAP0.0: 2375,4220 3300,3980 4225,4220 2375,4220 2605,4190 3300,4010 3995,4190 2605,4190
  region net CAP2.0: 3400,3980 5250,3980 4325,4220 3400,3980 3630,4010 5020,4010 4325,4190 3630,4010
  region net CAP3.0: 4425,4220 5350,4220 5350,3980 4425,4220 4655,4190 5320,4190 5320,4020 4655,4190
  region net CAP1.1: 1250,4300 1250,4255 5350,4255 5350,4300
  region net CAP1.1: 1250,3945 1250,3900 5350,3900 5350,3945
  region net CAP1.0: 4135.9,2465.94 4149.54,2473.82 cw(c4684.26,2791.63) 4690.03,3413.63 ccw(c4697.91,2815.27) 4190.77,2497.62 4217.74,2513.19 cw(c4684.25,2791.63) 4690.03,3334.88 ccw(c4697.91,2815.28) 4259.02,2537.02 4272.3,2544.69 ccw(c4697.91,2799.51) 5123.52,2544.69 cw(c4684.25,2791.62) 4243.96,2546.52 4217.02,2530.96 ccw(c4711.56,2791.63) 5191.72,2505.32 cw(c4684.26,2791.63) 4175.77,2507.14 4148.78,2491.56 ccw(c4711.56,2791.63) 5259.87,2465.86 cw(c4697.91,2799.51)
  pour cut-out: 3849.97,2792.5 ccw(c4701.5,2792.5) 4701.5,1940.97 ccw(c4701.5,2792.5) 5553.03,2792.5 ccw(c4701.5,2792.5) 4701.5,3644.03 ccw(c4701.5,2792.5)
  region net CAP1.2: 4697.91,2090.85 ccw(c4697.91,2799.51) 4697.91,3508.17 4697.91,3484.55 cw(c4697.91,2799.51) 4697.91,2114.47
  region net CAP1.2: 4697.91,2090.85 cw(c4697.91,2799.51) 4697.91,3508.17 4697.91,3484.55 ccw(c4697.91,2799.51) 4697.91,2114.47
  region net CAP1.2: 4697.91,2334.94 cw(c4697.91,2799.51) 4697.91,3264.08 4697.91,3240.45 ccw(c4697.91,2799.51) 4697.91,2358.56
  region net CAP1.2: 4697.91,2334.94 4697.91,2358.56 ccw(c4697.91,2799.51) 4697.91,3240.45 4697.91,3264.08 cw(c4697.91,2799.51)
  region net CAP3.0: 4238.2,2525 ccw(c4711.56,2791.63) 5185.95,2526.83 5212.92,2511.26 cw(c4684.26,2791.63) 4170,2485.63 ccw(c4711.56,2791.63) 5254.15,2487.45 5267.79,2479.58 ccw(c4697.91,2799.51) 4705.87,3453 cw(c4697.91,2815.27) 5239.16,2477.92 5212.18,2493.5 ccw(c4711.56,2791.63) 4705.78,3374.26 cw(c4697.91,2815.28) 5170.93,2517.32 5143.98,2532.88 ccw(c4711.57,2791.62) 4705.79,3295.51 cw(c4697.91,2799.51) 5131.4,2558.33 5144.68,2550.66 cw(c4684.25,2791.62)
  region net CAP0.0: 4128.03,2479.58 cw(c4697.91,2799.51) 4690.03,3453.01 4690.03,3437.26 cw(c4697.91,2815.27) 5233.69,2499.27 ccw(c4711.56,2791.63) 4690.03,3389.65 4690.03,3358.51 cw(c4697.91,2815.28) 5165.5,2538.64 ccw(c4711.57,2791.62) 4690.03,3310.85 4690.03,3295.51 ccw(c4697.91,2799.51) 4264.42,2558.33 cw(c4697.91,2815.28) 4705.78,3319.13 4705.78,3350.25 ccw(c4684.25,2791.63) 4196.22,2518.95 cw(c4697.91,2815.27) 4705.78,3397.88 4705.78,3429.04 ccw(c4684.26,2791.63)

## Silkscreen, mask and mechanical layers (free items; w line width, h text height)
Top Overlay:
  circle w25: c4697.91,2799.51 r429.13
  circle w25: c4697.91,2799.51 r224.41
  circle w25: c4697.91,2799.51 r720.47
  region: 2955,1380 6450,1620 6450,1380
  lines w6: 2950,1380 6450,1380 6450,1620 2950,1380
  lines w10: 2700,1900 2700,2700 ; 3900,300 4700,300 ; 500,500 900,500 900,900 500,900 500,500 ; 500,1300 900,1300 900,1700 500,1700 500,1300 ; 500,2100 900,2100 900,2500 500,2500 500,2100 ; 500,2900 900,2900 900,3300 500,3300 500,2900 ; 1300,500 1700,500 1700,900 1300,900 1300,500 ; 1300,1300 1700,1300 1700,1700 1300,1700 1300,1300 ; 1300,2100 1700,2100 1700,2500 1300,2500 1300,2100 ; 1300,2900 1700,2900 1700,3300 1300,3300 1300,2900 ; 2100,500 2500,500 2500,900 2100,900 2100,500 ; 2100,1300 2500,1300 2500,1700 2100,1700 2100,1300 ; 2100,2100 2500,2100 2500,2500 2100,2500 2100,2100 ; 2100,2900 2100,3300 2500,3300 2500,2900 2100,2900 ; 3300,500 3300,900 3700,900 3700,500 3300,500 ; 4100,500 4100,900 4500,900 4500,500 4100,500 ; 4900,500 4900,900 5300,900 5300,500 4900,500 ; 5700,500 5700,900 6100,900 6100,500 5700,500
  lines w20: 4202.21,702.5 4202.21,720.68 cw(c4279.03,720.68) 4224.71,775 cw(c4297.13,702.57) 4297.13,805 4302.28,805 cw(c4302.28,702.57) 4374.71,775 cw(c4320.39,720.68) 4397.21,720.68 4397.21,702.5 ; 4235,580 cw(c4221.21,593.79) 4221.21,574.29 4220.71,574.29 cw(c4271.42,625) 4199.71,625 ; 5000,600 5195,795 ; 5035,725 5035,650 5035,642 ccw(c5067,642) 5067,610 5100,610 ; 5050,575 5150,575 ; 5100,575 5100,610 ; 5165,725 5165,650 cw(c5125,650) 5125,610 5100,610 ; 4199.71,625 4189.71,700 4214.71,705 4224.71,630 4199.71,625 ; 5880,650 5825,650 5825,750 5880,750 ; 5880,650 5880,750 ; 5880,650 5975,595 5975,800 5880,750 ; 4374.71,630 4399.71,625 4409.71,700 4384.71,705 4374.71,630 ; 5065,670 ccw(c5100,670) 5100,635 ccw(c5100,670) 5135,670 5135,775 ccw(c5100,775) 5100,810 ccw(c5100,775) 5065,775 5065,670
  lines w25: 300,300 2700,300 2700,3500 300,3500 300,300 ; 1195,3900 3300,3900 5395,3900 5395,4300 1195,4300 1195,3900 ; 2900,1300 2900,1700 6500,1700 6500,1300 2900,1300 ; 3100,305 6300,305 6300,1100 3100,1100 3100,305
  text "TM" at 3790,4150 h125
  text "MSP CapTIvate  MCUs" at 2380,4030 h250
  text "1" at 625,3000 h400
  text "2" at 1410,3000 h400
  text "3" at 2220,3000 h400
  text "4" at 625,2195 h400
  text "5" at 1410,2195 h400
  text "6" at 2220,2195 h400
  text "VOLUME" at 2970,1475 h250
  text "7" at 625,1395 h400
  text "8" at 1410,1395 h400
  text "9" at 2220,1395 h400
  text "END CALL" at 3200,960 h150
  text "HEADSET" at 4020,960 h150
  text "MUTE" at 4920,960 h150
  text "SPEAKER" at 5620,960 h150
  text "X" at 3415,625 h300
  text "0" at 1410,595 h400
  text "#" at 2220,595 h400
  text "*" at 590,390 h800
Bottom Overlay:
  text "TM" at 3020,2630 h70
  text "MSP CapTIvate  MCUs" at 4120,2540 h175
  text "Capacitive Touch MCU Development Board" at 4410,2350 h125
  text "www.ti.com/captivate" at 3820,2205 h125
  text ".PRJ_Number" at 4104.7,1490 h125
  text ".PCB_Rev" at 3660,1390 h125
  text "Revision" at 4104.7,1390 h125
  text "For evaluation only; not FCC approved for resale" at 6410,180 h125
M1 Board Outline:
  the board outline again, w10
M2 Board Dimensions:
  rectangle: -0.5,-285.5 124.5,-160.5
  rectangle: 124.5,-410.5 499.5,-285.5
  lines w7: -0.5,-285.5 999.5,-285.5 ; 124.5,-410.5 124.5,-160.5 ; 249.5,-410.5 249.5,-160.5 ; 499.5,-410.5 499.5,-160.5 ; 749.5,-410.5 749.5,-160.5 ; -0.5,-410.5 999.5,-410.5 999.5,-160.5 -0.5,-160.5 -0.5,-410.5
  lines w10: -0.5,-475.5 -0.5,-455.5 ; 59.5,-485.5 -0.5,-465.5 ; 59.5,-445.5 -0.5,-465.5 ; 223.58,-465.5 -0.5,-465.5 ; 300,1100 2700,1100 ; 300,1900 2700,1900 ; 300,2700 2700,2700 ; 775.42,-465.5 999.5,-465.5 ; 939.5,-485.5 999.5,-465.5 ; 939.5,-445.5 999.5,-465.5 ; 999.5,-475.5 999.5,-455.5 ; 1100,300 1100,3500 ; 1900,300 1900,3500
  text "1000 (mil)" at 233.58,-501.49 h60
M5 Assembly Top:
  lines w10: -292,-930.17 6308,-930.17 ; -292,-726.83 6310,-726.83 ; -292,-523.5 -292,-1133.5 3713,-1133.5 6310,-1133.5 6310,-523.5 -291.5,-523.5 -291.5,-1133.5 1284,-1133.5 ; 2173,-1133.5 2173,-523.5 ; 3440,-726.83 3440,-523.5 ; 4280,-726.83 4280,-523.5 ; 4902,-1140 4902,-937.17
  text "PCB VIEWED FROM TOP SIDE" at -228.5,-655.67 h60
  text "BOARD #:" at 2248,-655.67 h60
  text "REV:" at 3638,-655.67 h60
  text ".PCB_Rev" at 3929.5,-655.67 h60
  text "SVN REV:" at 4476,-655.67 h60
  text ".VersionControl_RevNumber" at 4982,-655.67 h60
  text "IGNORE ->" at -228.5,-858.49 h60
  text "PLOT NAME =" at -228.5,-1064.34 h60
  text "GENERATED    :" at 2250,-1064.34 h60
  text ".Print_Date" at 3119.5,-1064.34 h60
  text ".Print_Time" at 3848.5,-1064.34 h60
  text "TEXAS INSTRUMENTS" at 5113,-1064.34 h60
M6 Assembly Bottom:
  lines w10: -292.5,-727.33 6309.5,-727.33 ; -290.5,-930.67 6309.5,-930.67 ; 1115.5,-1140.5 1115.5,-937.67 ; 1737.5,-727.33 1737.5,-524 ; 2577.5,-727.33 2577.5,-524 ; 3844.5,-1134 3844.5,-524 ; 4733.5,-1134 6309,-1134 6309,-524 -292.5,-524 -292.5,-1134 2304.5,-1134 6309.5,-1134 6309.5,-524
M9 Title Sheet:
  drawing of 57 lines, arcs and shapes, not listed
  text "1" at 739.84,8036.5 h70
  text "2" at 3235.5,8036.5 h70
  text "3" at 5724.84,8036.5 h70
  text "4" at 8231.51,8036.5 h70
  text "5" at 10730.5,8036.5 h70
  text "6" at 13235.5,8036.5 h70
  text "A" at -416.5,6893.5 h70
  text "A" at 14383.5,6893.5 h70
  text "B" at -416.5,4513.5 h70
  text "B" at 14383.5,4513.5 h70
  text "C" at -416.5,2138.5 h70
  text "C" at 14383.5,2138.5 h70
  text "PROJECT TITLE:" at 11343.5,277.5 h45
  text "TICAPEVM_PHONE" at 11393.5,144.17 h70
  text "DESIGNED FOR:" at 11343.5,-23.5 h45
  text "EVM" at 11393.5,-163.5 h70
  text "D" at -416.5,-231.5 h70
  text "D" at 14383.5,-231.5 h70
  text "FILE NAME:" at 11343.5,-323.5 h45
  text ".PCB_File_Name_No_Path" at 11393.5,-443.5 h70
  text "Texas Instruments (TI) and/or its licensors do not warrant the accuracy or completeness of this specification" at 6374,-605.34 h45
  text "ENGINEER:" at 11343.5,-613.5 h45
  text "LAYOUT BY:" at 12848.5,-613.5 h45
  text "or any information contained therein. TI and/or its licensors do not warrant that this design will meet" at 6329.01,-718 h45
  text "W. Schnoor" at 11393.5,-768.49 h70
  text "W. Schnoor" at 12899,-768.49 h70
  text "the specifications, will be suitable for your application or fit for any particular purpose, or will operate in" at 6329.01,-830.67 h45
  text "ALTIUM DESIGNER VERSION:" at 12848.5,-923.5 h45
  text "an implementation. TI and/or its licensors do not warrant that the design is production worthy. You should" at 6329.01,-943.33 h45
  text "completely validate and test your design implementation to confirm the system functionality for your application." at 6374,-1056 h45
  text "1:1" at 11393.5,-1056.83 h70
  text ".Application_BuildNumber" at 12899,-1056.83 h70
  text "1" at 739.84,-1263.5 h70
  text "2" at 3235.5,-1263.5 h70
  text "3" at 5724.84,-1263.5 h70
  text "4" at 8231.51,-1263.5 h70
  text "5" at 10730.5,-1263.5 h70
  text "6" at 13235.5,-1263.5 h70
M10 Fab Notes:
  drawing of 212 lines, arcs and shapes, not listed
  text "DESIGN INFORMATION" at 12381.02,6810 h60
  text "(REFER ALSO ARRAY/PANEL PROFILING INFORMATION)" at 12019.46,6648.29 h60
  text "BOARD SIZE" at 11333.46,6644 h60
  text "3450MIL" at 11795.78,6516.18 h60
  text "X" at 12301.46,6516.18 h60
  text "4950MIL" at 12532.78,6516.18 h60
  text "Number of Layers :" at 11736.46,6319 h60
  text "2" at 12831.27,6309 h60
  text "MIN. TRACK WIDTH:" at 11736.46,6180 h60
  text "8" at 12832.7,6180 h60
  text "MIL" at 12987.46,6180 h60
  text "MIN. CLEARANCE:" at 11736.46,6048 h60
  text "8" at 12832.7,6048 h60
  text "MIL" at 12987.46,6048 h60
  text "MIN. VIA PAD SIZE:" at 11736.46,5916 h60
  text "24" at 12802.71,5916 h60
  text "MIL" at 12987.46,5916 h60
  text "0.05mm (2MIL)" at 12431.46,5774.29 h60
  text "MINIMUM ANNULAR RING" at 11407.23,5770 h60
  text "EXTERNAL" at 13139.46,5770 h60
  text "PER" at 11607.23,5652 h60
  text "IPC-D-275 CLASS 2 LEVEL C" at 11827.23,5652 h60
  text "MIL, HOLES" at 13315.46,5539.71 h60
  text "+/-" at 12923,5539 h60
  text "+/-" at 13777,5539 h60
  text "REGISTRATION TOLERANCES:" at 11407.23,5534 h60
  text "METAL" at 12607,5534 h60
  text "5" at 13183.2,5534 h60
  text "3" at 14016.2,5534 h60
  text "MIL" at 14132.46,5534 h60
  text "MATERIAL:" at 11332.46,5324.54 h60
  text "FR-4 High Tg" at 12318.9,5184.21 h60
  text "FR-408" at 11753.46,5175.64 h60
  text "X" at 12165.46,5175.64 h60
  text "OTHER" at 13241.46,5175.64 h60
  text "62 MIL (1.6mm) +/-10%" at 12073.56,5012.92 h60
  text "THICKNESS:" at 11407.23,5008.64 h60
  text "X" at 11945.4,5008.64 h60
  text "OTHER" at 13358.46,5008.64 h60
  text "TOLERANCE:" at 11407.23,4850.64 h60
  text "X" at 12246.53,4850.64 h60
  text "ANSI IPC-6012 TYPE 3 CLASS 2" at 12433.48,4850.64 h60
  text "OTHER +/-" at 12433.46,4694.64 h60
  text "BOW & TWIST:" at 11407.23,4537.64 h60
  text "X" at 12246.53,4537.64 h60
  text "ANSI IPC-6012 TYPE 3 CLASS 2" at 12433.48,4537.64 h60
  text "OTHER +/-" at 12433.46,4379.13 h60
  text "COPPER THICKNESS (FINISHED):" at 11332.46,4243.64 h60
  text "1.4MIL (1oz)" at 12212.46,4090.92 h60
  text "2MIL (1.4oz)" at 12979.46,4090.92 h60
  text "2.8MIL (2oz)" at 13706.46,4090.92 h60
  text "OUTER:" at 11689.46,4086.64 h60
  text "X" at 12084,4086 h60
  text "1.4MIL (1oz)" at 12212.46,3933.92 h60
  text "2.8MIL (2oz)" at 12979.46,3933.92 h60
  text "N/A" at 13706,3934.29 h60
  text "INNER SIGNAL:" at 11400.38,3929.64 h60
  text "X" at 12085.42,3929.64 h60
  text "DRILLING:" at 11332.46,3790.64 h60
  text "REFERENCE:" at 11407.23,3673.64 h60
  text "X" at 12055.46,3673.64 h60
  text "AS SHOWN" at 12242.46,3673.64 h60
  text "X" at 12956.46,3673.64 h60
  text "NC_DRILL FILES" at 13093.46,3673.64 h60
  text "PTH MIN COPPER THICKNESS:" at 11407.23,3515.64 h60
  text "X" at 12757.46,3515.64 h60
  text "1MIL" at 12894.46,3515.64 h60
  text "OTHER" at 13391.46,3515.64 h60
  text "BOARD FINISH:" at 11332.46,3356.64 h60
  text "SILKSCREEN:" at 11487.68,3238.64 h60
  text "X" at 12436.46,3238.64 h60
  text "TOP" at 12562.46,3238.64 h60
  text "X" at 12946.46,3238.64 h60
  text "BOTTOM" at 13073.46,3238.64 h60
  text "SILKSCREEN COLOR:" at 11487.68,3071.64 h60
  text "X" at 12435.42,3071.64 h60
  text "WHITE" at 12562.46,3071.64 h60
  text "OTHER" at 13073.46,3071.64 h60
  text "SOLDER RESIST COLOR:" at 11487.68,2901.64 h60
  text "X" at 13155,2755 h60
  text "BLACK" at 13640,2750 h200
  text "GREEN" at 12182.46,2742.44 h60
  text "BLUE" at 12773.46,2742.44 h60
  text "OTHER" at 13311.46,2742.44 h60
  text "IMMERSION GOLD (ENIG)" at 12393.46,2553.92 h60
  text "ENEPIG" at 13731,2550.64 h60
  text "SURFACE FINISH:" at 11332.46,2549.64 h60
  text "X" at 12206.51,2549.64 h60
  text "IMM. TIN/SILVER OR EQUIV" at 11662,2392.64 h60
  text "OTHER" at 13093.46,2392.64 h60
  text "ARRAY/PANEL:" at 11332.46,2213.64 h60
  text "CUT AND TRIM PER MECH LAYER 1" at 12393.46,2209.35 h60
  text "N.C. ROUTE" at 12393.46,2057.64 h60
  text "X" at 13072.46,2057.64 h60
  text "V. SCORE" at 13259.46,2057.64 h60
  text "CERTIFICATION:" at 11332.46,1920.64 h60
  text "MATERIALS AND WORKMANSHIP FOR ALL PCBS" at 12057.46,1920.64 h60
  text "TO MEET OR EXCEED THE REQUIREMENTS OF:" at 12057.46,1822.64 h60
  text "X" at 11683.96,1686.13 h60
  text "ANSI IPC-A-600F CLASS ->" at 11822.96,1686.13 h60
  text "X" at 13462.02,1686.13 h60
  text "2" at 13580.96,1686.14 h60
  text "1" at 13265.96,1684.64 h60
  text "3" at 13934.96,1684.64 h60
  text "X" at 11686.02,1526.64 h60
  text "UL 94V-0" at 11822.96,1526.64 h60
  text "X" at 12498.02,1526.64 h60
  text "RoHS" at 12634.96,1526.64 h60
  text "OTHER" at 13279.36,1526.64 h60
  text "PER ORDER" at 13676.42,1526.64 h60
  text "ADDITIONAL REQUIREMENTS:" at 11332.46,1385.64 h60
  text "MICROSECTION:" at 11407.23,1270.64 h60
  text "YES" at 12312.96,1270.64 h60
  text "REQUIRED" at 13174.46,1114.49 h60
  text "BARE BOARD ELEC. TEST:" at 11407.23,1111.64 h60
  text "NONE" at 12712.96,1111.64 h60
  text "X" at 13047.46,1111.64 h60
  text "PER ORDER" at 13766.46,1111.64 h60
  text "MANUFACTURER'S UL:" at 11407.23,954.64 h60
  text "RAIL" at 12572.96,950.35 h60
  text "METAL" at 13064.77,950.35 h60
  text "X" at 13440,950 h60
  text "SILK" at 13576.46,950.35 h60
M12 Stackup:
  lines w6: 11360,7460 13910,7460 ; 11360,7564.4 13910,7564.4 ; 11300,6975 ccw(c11334,6975) 11334,6941 13936,6941 ccw(c13936,6975) 13970,6975 13970,7681 ccw(c13936,7681) 13936,7715 11334,7715 ccw(c11334,7681) 11300,7681 11300,6975
  text "The Stackup Legend below this is static." at 11605.5,7874.5 h60
  text "If you change the stackup, update the Legend." at 11615.5,7784.5 h60
  text "Layer Stack Up Detail for: Ref_Design.PcbDoc" at 11360,7597.1 h57
  text "Layer" at 11360,7525.4 h24
  text "Gerber" at 12255.81,7525.4 h24
  text "Copper" at 12819.33,7525.4 h24
  text "Dielectric" at 13422.04,7525.4 h24
  text "Name" at 11360,7477.4 h24
  text "Document" at 12255.81,7477.4 h24
  text "Thickness" at 12819.33,7477.4 h24
  text "Material" at 13422.04,7477.4 h24
  text "Top Solder Mask" at 11360,7384.44 h34
  text "(.GTS)" at 12255.81,7384.44 h34
  text "Solder Resist" at 13422.04,7384.44 h34
  text "Top Layer" at 11360,7287.69 h34
  text "(.GTL)" at 12255.81,7287.69 h34
  text "1.4mil" at 12819.33,7287.69 h34
  text "FR-4" at 13422.04,7239.31 h34
  text "Bottom Layer" at 11360,7190.94 h34
  text "(.GBL)" at 12255.81,7190.94 h34
  text "1.4mil" at 12819.33,7190.94 h34
  text "Bottom Solder Mask" at 11360,7094.19 h34
  text "(.GBS)" at 12255.81,7094.19 h34
  text "Solder Resist" at 13422.04,7094.19 h34
Mechanical 18:
  lines w1: 0,0 6900,0 6900,5300 4560,5300 ccw(c4560,5280) 4540,5280 4540,5070 cw(c4520,5070) 4520,5050 4290,5050 ccw(c4290,5010) 4250,5010 4250,4860 cw(c4230,4860) 4230,4840 2650,4840 cw(c2650,4860) 2630,4860 2630,5010 ccw(c2590,5010) 2590,5050 2380,5050 cw(c2380,5070) 2360,5070 2360,5280 ccw(c2340,5280) 2340,5300 0,5300 0,0

## Dimensions
0,5300 to 6900,5300 on M2 Board Dimensions
6900,0 to 6900,5300 on M2 Board Dimensions

## Text inside footprints (layer, text, board x,y; h text height)
J1: Top Overlay "9" at 3488,4783 h80; Top Overlay "16" at 4170,4783 h80; Top Overlay "8" at 3383,4783 h80; Top Overlay "C" at 2590,4865 h80; Top Overlay "B" at 2590,4965 h80; Top Overlay "A" at 2590,5065 h80; Top Overlay "1" at 2688,4782 h80; M2 Board Dimensions "PCB Edge" at 3370,5260 h23.62
Logo1: Bottom Overlay "Pb" at 759.25,162.18 h120